# Altium PCB BGT60LTR11AIP_Shield_V2.0.PcbDoc
Units mm, origin at the board's own origin, x right, y up, seen from the top; angles counter-clockwise.
Board outline 20.32 x 6.25 mm, 4 copper layers (L1_Top, L2_GND, L3_SIG, L4_Bot), stack 1.144 mm thick; 64 components, 46 nets, 234 pads, 69 vias.
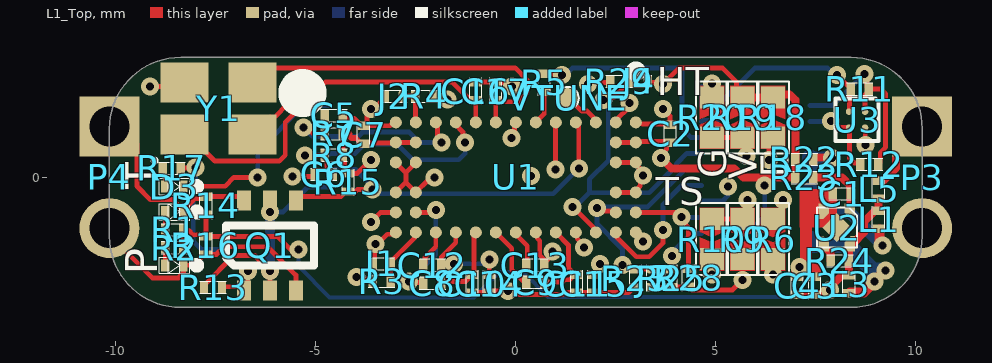
[diagram p0: L1_Top view]
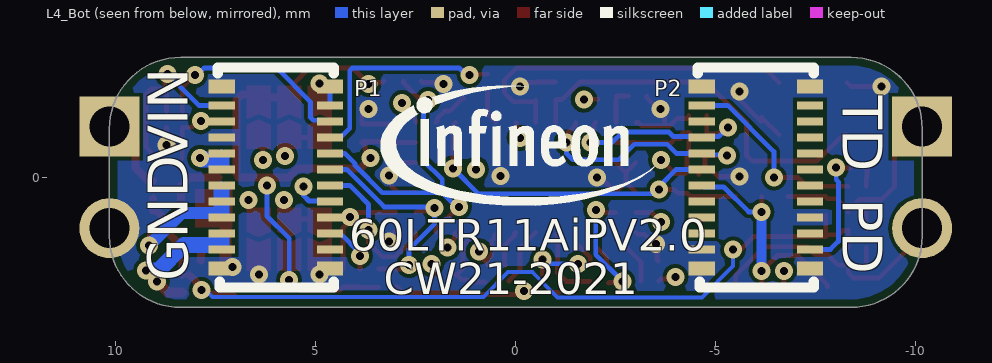
[diagram p1: L4_Bot view, seen from below]
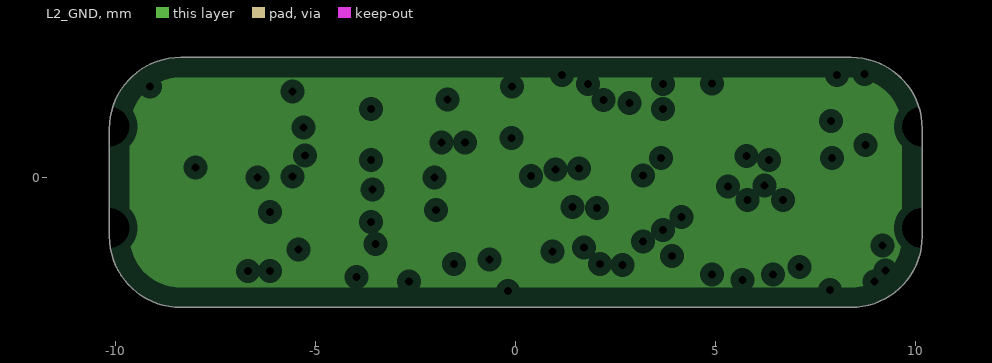
[diagram p2: L2_GND, clearances drawn from the general rule]
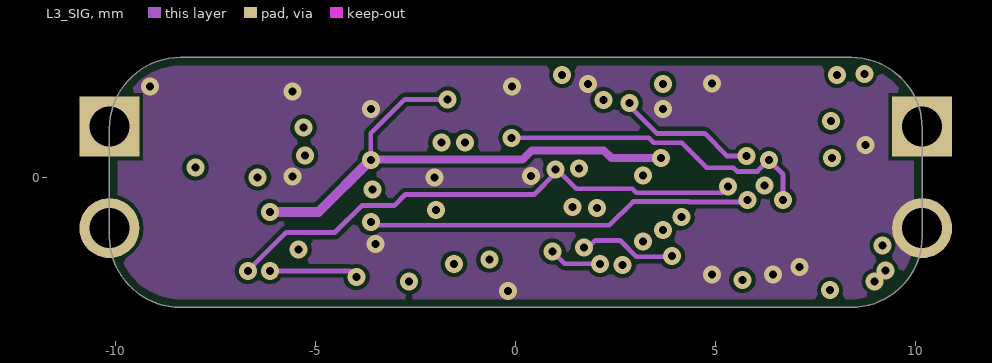
[diagram p3: L3_SIG]

## Layer stack, top to bottom
Top Solder: solder mask 0.02, Solder Resist, Dk 3.5
L1_Top: signal copper 0.042
Dielectric1: core 0.56, FR-4, Dk 4.2
L2_GND: plane copper 0.035
Dielectric8: prepreg 0.23, FR-4, Dk 4.2
L3_SIG: signal copper 0.035
Dielectric2: core 0.2, FR-4, Dk 4.3
L4_Bot: signal copper 0.042
Bottom Solder: solder mask 0.02, Solder Resist, Dk 3.5

## Board outline
-10.16,-1.472 ccw(c-8.382,-1.472) -8.382,-3.25 8.382,-3.25 ccw(c8.382,-1.472) 10.16,-1.472 10.16,1.222 ccw(c8.382,1.222) 8.382,3 -8.382,3 ccw(c-8.382,1.222) -10.16,1.222

## Design rules (kind name [scope] priority, off if disabled: settings)
BoardOutlineClearance [All] p1: gap=0.203 ignorepadtopadclearanceinfootprint=FALSE
Clearance Clearance_HighVoltage [InNetClass('HighVoltage') vs Not InNetClass('HighVoltage')] p1 off: gap=0.076 ignorepadtopadclearanceinfootprint=FALSE except(0: Arc-Hole Track-Hole SMDPad-Hole THPad-Hole Via-Hole Fill-Hole Poly-Hole Region-Hole Text-Hole)
Clearance Clearance_BGA [WithinRoom('BGA_Fanout_Area')] p2 off: gap=0.076 ignorepadtopadclearanceinfootprint=FALSE except(0: Arc-Hole Track-Hole SMDPad-Hole THPad-Hole Via-Hole Fill-Hole Poly-Hole Region-Hole Text-Hole) // Clearance for BGA Fanout Area
Clearance Clearance_NDK [((HoleType ='Round') and (PadisPlated = 'False')) and not (Holesize ='0')  or ((HoleType ='Slot') and (PadisPlated = 'False')) and not (Holesize ='0')] p3 off: gap=0.076 ignorepadtopadclearanceinfootprint=FALSE except(0: Arc-Hole Track-Hole SMDPad-Hole THPad-Hole Via-Hole Fill-Hole Poly-Hole Region-Hole Text-Hole) // Clearance Non Plated Holes
Clearance Clearance_Fiducials [InComponentClass('Fiducials')] p4 off: gap=1 ignorepadtopadclearanceinfootprint=FALSE except(0: Arc-Hole Track-Hole SMDPad-Hole THPad-Hole Via-Hole Fill-Hole Poly-Hole Region-Hole Text-Hole)
Clearance Clearance_Edge_Fiducials [InComponentClass('Fiducials')] p5 off: gap=6 ignorepadtopadclearanceinfootprint=FALSE except(0: Arc-Hole Track-Hole SMDPad-Hole THPad-Hole Via-Hole Fill-Hole Poly-Hole Region-Hole Text-Hole) // Protel DXP Scope 2 Expression Was: IsBoardOutline
Clearance Clearance_All [All] p6: gap=0.1 ignorepadtopadclearanceinfootprint=FALSE // minimum Clearance on PCB
ComponentClearance [HasFootprint('QS_Jumper') or HasFootprint('TP0.5MM')] p1: gap=0 collisioncheckmode=3 verticalgap=0 showdistances=FALSE
ComponentClearance ComponentClearance_All [All] p2: gap=0.12 collisioncheckmode=3 verticalgap=0 showdistances=FALSE
DiffPairsRouting DiffPairsRouting_Z0_DIFF_100R [InNetClass('Z0_DIFF_100R')] p1: maxlimit=0.2 minlimit=0.17 mostfreqgap=0.2 toplayer_mingap=0.2 toplayer_minwidth=0.381 toplayer_maxwidth=0.381 toplayer_prefwidth=0.381 midlayer1_maxgap=0.17 midlayer1_prefgap=0.17 midlayer1_minwidth=0.381 midlayer1_maxwidth=0.381 midlayer1_prefwidth=0.381 bottomlayer_mingap=0.2 bottomlayer_minwidth=0.381 bottomlayer_maxwidth=0.381 bottomlayer_prefwidth=0.381 maxuncoupledlength=25
DiffPairsRouting DiffPairsRouting_All [All] p2: maxlimit=0.5 minlimit=0.12 mostfreqgap=0.15 toplayer_minwidth=0.381 toplayer_maxwidth=0.381 toplayer_prefwidth=0.381 midlayer1_minwidth=0.381 midlayer1_maxwidth=0.381 midlayer1_prefwidth=0.381 bottomlayer_minwidth=0.381 bottomlayer_maxwidth=0.381 bottomlayer_prefwidth=0.381 maxuncoupledlength=25
FabricationTestPointUsage TestPointUsage [All] p1: valid=0 allowmultiple=FALSE
FabricationTestpoint Testpoint [All] p1: side=3 testpointundercomponent=TRUE minsize=1 maxsize=2.5 preferedsize=1.5 minholesize=0 maxholesize=1 preferedholesize=0.8 testpointgrid=0.025 allowsidetop=TRUE allowsidebottom=TRUE usegrid=TRUE gridtolerance=0
FanoutControl Fanout_LCC [All] p1 off: bgadir=Out bgaviamode=Centered fanoutstyle=Auto fanoutdirection=Alternating viagrid=0.025 // Protel DXP Scope 1 Expression Was: IsLCC   Fanout_LCC (Default Rule)
FanoutControl Fanout_BGA [All] p2 off: bgadir=Out bgaviamode=Centered fanoutstyle=Auto fanoutdirection=Alternating viagrid=0.025 // Protel DXP Scope 1 Expression Was: IsBGA   Fanout_BGA (Default Rule)
FanoutControl Fanout_SOIC [All] p3 off: bgadir=Out bgaviamode=Centered fanoutstyle=Auto fanoutdirection=Alternating viagrid=0.025 // Protel DXP Scope 1 Expression Was: IsSOIC   Fanout_SOIC (Default Rule)
FanoutControl Fanout_Default [All] p4: bgadir=Out bgaviamode=Centered fanoutstyle=Auto fanoutdirection=Alternating viagrid=0.025 // Fanout_Default (Default Rule)
FanoutControl Fanout_Small [All] p5 off: bgadir=Out bgaviamode=Centered fanoutstyle=Auto fanoutdirection=Alternating viagrid=0.025 // Protel DXP Scope 1 Expression Was: (CompPinCount < 5)   Fanout_Small (Default Rule)
Height Height_Top_In_Area [WithinRoom('Height_Top_Area')] p1: minheight=0 maxheight=8.4 prefheight=5.7 // Dedicated Height Constraint in Area
Height Height_Bot_No_Constraint [InComponentClass('Height_Bottom_exclude')] p2: minheight=0 maxheight=999 prefheight=12.7 // no max. Height constraint on Bottom Side
Height Height_Top_No_Constraint [InComponentClass('Height_Top_exclude')] p3: minheight=0 maxheight=999 prefheight=12.7 // no max. Height constraint on Top Side
Height Height_Bot [OnBottom] p4: minheight=0 maxheight=3 prefheight=2.5 // max. Component Height on PCB Bottom Side
Height Height_All [All] p5: minheight=0 maxheight=50 prefheight=12.7 // Default Component Height
HoleSize HoleSize_All [All] p1: absolutevalues=TRUE maxlimit=1 minlimit=0.1 maxpercent=80.000 minpercent=20.000
HoleToHoleClearance [All] p1: gap=0.25 allowstackedmicrovias=TRUE
Length Length_HighSpeed [InNetClass('HighSpeed')] p1: maxlimit=250 minlimit=0
Length Length_Default [InNetClass('TraceLength')] p2: maxlimit=500 minlimit=0 // min./max. Trace Length will be applied
MatchedLengths MatchedLengths_HighSpeed [InNetClass('HighSpeed')] p1: tolerance=25.4 checknetsindiffpair=FALSE checkdiffpairvsdiffpair=TRUE checkxsignals=TRUE checkothers=TRUE
MatchedLengths MatchedLengths_Default [InNetClass('MatchedLength')] p2: tolerance=100.5 checknetsindiffpair=TRUE checkdiffpairvsdiffpair=FALSE checkxsignals=FALSE checkothers=FALSE // Default Length Matching
MaxMinImpedance MaxMinImpedance_Z0_50R [InNetClass('Z0_50R')] p1: minimum=45,00 maximum=55,00 // Impedance Tolerance for 50 Ohms Traces
MaxMinImpedance MaxMinImpedance_All [All] p2: minimum=30,00 maximum=80,00 // Default Impedance Tolerance
MaximumViaCount MaximumViaCount_CLK [InNetClass('Clock')] p1: limit=10
MaximumViaCount MaximumViaCount_HighSpeed [InNetClass('HighSpeed')] p2: limit=10 // Max. Number of Vias in Net
MinimumAnnularRing MinimumAnnularRing_All [All] p1: minimumring=0.05
MinimumSolderMaskSliver [All] p1: minsoldermaskwidth=0.1
NetAntennae NetAntennae_High_Speed [InNetClass('HighSpeed')] p1: netantennaetolerance=3
NetAntennae NetAntennae_All [All] p2: netantennaetolerance=10
ParallelSegment ParallelSegment_Broad_Default [InNetClass('XTalk_Broadside_Coupled') vs InNetClass('HighSpeed') Or InNetClass('XTalk_Broadside_Coupled') Or InNetClass('XTalk_Edge_Coupled')] p1: limit=15 gap=0.2 // Default Rule for Broadside-Coupled Traces
ParallelSegment ParallelSegment_Edge_Default [InNetClass('XTalk_Edge_Coupled') vs InNetClass('HighSpeed') Or InNetClass('XTalk_Broadside_Coupled') Or InNetClass('XTalk_Edge_Coupled')] p2: limit=15 gap=0.12 // Default Rule for Edge-Coupled Traces
ParallelSegment ParallelSegment_Default [InNetClass('HighSpeed') vs InNetClass('HighSpeed')] p3: limit=25 gap=0.12 // Max. Coupled Length for all High-Speed Signals
PlaneClearance PlaneClearance_HighVoltage [InNetClass('HighVoltage')] p1: clearance=0.5
PlaneClearance [All] p2: clearance=0.2
PlaneConnect PlaneConnect_All [All] p1: planeconnectstyle=Direct reliefexpansion=0.2 reliefentries=4 reliefconductorwidth=0.25 reliefairgap=0.2
PolygonConnect PolygonConnect_HighCurrent [(OnTopLayer Or OnBottomLayer) And InNetClass('HighCurrent')] p1: connectstyle=Direct reliefconductorwidth=0.1 reliefentries=4 polygonreliefangle="45 Angle" airgapwidth=0.1
PolygonConnect PolygonConnect_Outer [OnTopLayer Or OnBottomLayer] p2: connectstyle=Direct reliefconductorwidth=0.1 reliefentries=4 polygonreliefangle="45 Angle" airgapwidth=0.1 // Polygon Connection on outer Layers
PolygonConnect PolygonConnect_All [All] p3: connectstyle=Direct reliefconductorwidth=0.1 reliefentries=4 polygonreliefangle="45 Angle" airgapwidth=0.1 // Default Polygon Connection
RoutingCorners [All] p1: cornerstyle=45-Degree minsetback=2 maxsetback=2
RoutingTopology RoutingTopology_CLK [InNetClass('Clock')] p1: topology=Daisy_Balanced
RoutingTopology RoutingTopology_HighSpeed [InNetClass('HighSpeed')] p2: topology=Daisy_Simple
RoutingTopology RoutingTopology_All [All] p3: topology=Shortest
RoutingVias RoutingVias_HighCurrent [InNetClass('HighCurrent')] p1: holewidth=0.1 width=0.2 viastyle="Through Hole" minholewidth=0.1 minwidth=0.2 maxholewidth=1 maxwidth=1 // Via Size for High-Current Nets
RoutingVias RoutingVias_BGA_Fanout [WithinRoom('BGA_Fanout_Area')] p2: holewidth=0.1 width=0.2 viastyle="Through Hole" minholewidth=0.1 minwidth=0.2 maxholewidth=1 maxwidth=1 // Via Size for BGA Fanout Area
RoutingVias RoutingVias_PWR [All] p3: holewidth=0.1 width=0.2 viastyle="Through Hole" minholewidth=0.1 minwidth=0.2 maxholewidth=1 maxwidth=1 // Via size for Power and GND nets
RoutingVias RoutingVias_All [All] p4: holewidth=0.1 width=0.2 viastyle="Through Hole" minholewidth=0.1 minwidth=0.2 maxholewidth=1 maxwidth=1 // Default Via size
SilkToSilkClearance [All] p1: silktosilkclearance=0.15
SilkToSolderMaskClearance SilkscreenOverComponentPads [IsPad] p1: minsilkscreentomaskgap=0.2 clearancetoexposedcopper=TRUE
SolderMaskExpansion [All] p1: expansion=0.051 istentingtop=FALSE
StubLength StubLength_CLK [InNetClass('Clock')] p1: limit=25
StubLength StubLength_HighSpeed [InNetClass('HighSpeed')] p2: limit=30
SupplyNets SupplyNets_GND [InNet('GND')] p1: voltage=0,000
SupplyNets SupplyNets_12V [InNetClass('PWR_Supply_12V')] p2: voltage=12,00
SupplyNets SupplyNets_5V0 [InNetClass('PWR_Supply_5V0')] p3: voltage=5,000
SupplyNets SupplyNets_3V3 [InNetClass('PWR_Supply_3V3')] p4: voltage=3,000
SupplyNets SupplyNets_1V0 [InNetClass('PWR_Supply_1V0')] p5: voltage=1,000
UnpouredPolygon [All] p1: allowunpoured=TRUE allowshelved=TRUE
Width Width_HighCurrent [All] p1 off: maxlimit=0.203 minlimit=0.076 preferedwidth=0.152 minimp=50.000000 maximp=50.000000 favimp=50.000000 // Width for High-Current Traces
Width Width_BGA_Fanout [WithinRoom('BGA_Fanout_Area')] p2 off: maxlimit=1 minlimit=0.1 preferedwidth=0.1 // Trace Width for BGA Fanout Area
Width Width_Z0_DIFF_100R [InNetClass('Z0_DIFF_100R')] p3 off: maxlimit=0.12 minlimit=0.11 preferedwidth=0.12 toplayer_minwidth=0.12 midlayer1_maxwidth=0.11 midlayer1_prefwidth=0.11 bottomlayer_minwidth=0.12 minimp=50.000000 maximp=50.000000 favimp=50.000000
Width Width_Z0_50R [InNetClass('Z0_50R')] p4 off: maxlimit=0.16 minlimit=0.12 preferedwidth=0.16 toplayer_minwidth=0.16 midlayer1_maxwidth=0.12 midlayer1_prefwidth=0.12 bottomlayer_minwidth=0.16 minimp=50.000000 maximp=50.000000 favimp=50.000000
Width Width_PWR [InNetClass('Power')] p5 off: maxlimit=5 minlimit=0.2 preferedwidth=0.2 // Width for Power and GND nets
Width Width_All [All] p6: maxlimit=5 minlimit=0.1 preferedwidth=0.12 // minimum Width on PCB
9 further rules are at their usual default settings.

## Components (designator, comment, footprint, x,y, rotation, side; value= is the part's Value field where it differs from the comment)
C1 "4.7µF" C_0201 8.153,-0.406 r0 top value=0201
C2 "100nF" C_0201 3.861,1.092 r270 top value=0201
C3 "4.7µF" C_0201 7.473,-2.711 r270 top value=0201
C4 "100nF" C_0201 7.033,-2.711 r270 top value=0201
C5 "150nF" C_0201 -4.547,1.548 r0 top
C6 "150nF" C_0201 -4.801,0.076 r0 top
C7 "100nF" C_0201 -3.81,1.067 r270 top value=0201
C8 "10nF" C_0201 -2.088,-2.641 r180 top
C9 "10nF" C_0201 0.486,-2.616 r180 top
C10 "5.6nF" C_0201 -1.087,-2.655 r90 top
C11 "5.6nF" C_0201 1.524,-2.655 r90 top
C12 "10nF" C_0201 -2.088,-2.191 r180 top
C13 "10nF" C_0201 0.486,-2.191 r180 top
C14 "5.6nF" C_0201 -0.662,-2.655 r90 top
C15 "5.6nF" C_0201 1.949,-2.655 r90 top
C16 "11pF" C_0201 -1,2.159 r90 top value=0201
C17 "16pF" C_0201 -0.5,2.159 r270 top value=0201
D3 "Yellow LED 0201" LED_0201 -8.534,-0.229 r180 top value=0201
J1 "DNP" QS_JUMPER -3.353,-2.159 r0 top value=0201
J2 "0R" QS_JUMPER -3.048,2.032 r0 top value=0201
J3 "100K" QS_JUMPER 3.429,-2.518 r90 top value=0201
J4 "100K" QS_JUMPER 3.073,2.407 r180 top value=0201
L1 "DNP" R_0201 9.068,-1.057 r90 top
L3 "MMZ0603S121HT000" R_0201 8.331,-2.667 r90 top
L5 "MMZ0603S121HT000" R_0201 9.068,-0.305 r270 top
P "Red LED 0201" LED_0201 -8.534,-2.197 r180 top value=XZMER155W
P1 "DF40C-20DP-0.4V" DF40C-20DP-0.4V 6,0 r270 bottom locked
P2 "DF40C-20DP-0.4V" DF40C-20DP-0.4V -6,0 r270 bottom locked
P3 "2 Pin Header" HDR1X2_HALF 10.16,1.27 r270 top locked
P4 "2 Pin Header" HDR1X2_HALF -10.16,1.27 r270 top locked
Q1 "BSD840N" INF-PG-SOT-363_N -6.147,-1.702 r90 top
R1 "1k" R_0201 -8.534,-1.308 r0 top value=0201
R2 "1K" R_0201 -8.534,-1.753 r0 top value=0201
R3 "0R" R_0201 -3.353,-2.591 r180 top value=0201
R4 "DNP" R_0201 -2.286,2.032 r0 top value=0201
R5 "0R" R_0201 0.711,2.367 r90 top value=0201
R6 "0R" RES_FASTSOLDER_0402 6.426,-1.541 r90 top value=0402
R7 "DNP" R_0201 -4.547,1.091 r0 top value=0201
R8 "DNP" R_0201 -4.547,0.559 r180 top value=0201
R9 "DNP" RES_FASTSOLDER_0402 5.664,-1.541 r90 top value=0402
R10 "0R" RES_FASTSOLDER_0402 4.902,-1.541 r90 top value=0402
R11 "2k2" R_0201 8.597,2.21 r180 top value=0201
R12 "2k2" R_0201 8.839,0.33 r180 top value=0201
R13 "100k" R_0201 -7.569,-2.743 r180 top value=0201
R14 "10k" R_0201 -7.747,-0.711 r270 top value=0201
R15 "100k" R_0201 -4.191,-0.127 r90 top value=0201
R16 "10k" R_0201 -7.747,-1.702 r90 top value=0201
R17 "1k" R_0201 -8.6,0.229 r0 top value=0201
R18 "DNP" RES_FASTSOLDER_0402 6.426,1.499 r270 top value=0402
R19 "DNP" RES_FASTSOLDER_0402 5.664,1.499 r270 top value=0402
R20 "DNP" RES_FASTSOLDER_0402 4.902,1.499 r270 top value=0402
R22 "DNP" R_0201 7.214,0.457 r0 top value=0201
R23 "0R" R_0201 7.214,0 r0 top value=0201
R24 "0R" R_0201 8.103,-2.083 r0 top value=0201
R25 "10K" R_0201 3.886,-2.519 r90 top value=0201
R27 "DNP" R_0201 3.001,-2.518 r90 top value=0201
R28 "10K" R_0201 4.318,-2.511 r90 top value=0201
R29 "DNP" R_0201 2.583,2.407 r0 top value=0201
T "Green LED" LED_0201 -8.534,-0.864 r180 top value=XZBGR155W5MAV
U1 "BGT60LTR11AiP" BGA42N50P13X7_670X330X56_NEW 0,0 r270 top locked
U2 "NCP163AMX150TBG" NCP177 8.026,-1.254 r180 top
U3 "24CW1280T-I/CS0668" "WLCSP4 (CS0)" 8.531,1.445 r270 top
VTUNE "Testpoint" TP0.3MM 1.295,1.981 r90 top
Y1 "FH3840024Z" "NDK NX2520SA_NOBOARDER" -7.43,1.717 r0 top

## Footprints (in the part's own frame and the unit in brackets; to place one, negate y for a bottom-side part, rotate by r counter-clockwise, add the part's x,y. Pads: shape width x height; smd on the part's side, far side on the other; paste and mask are expansions set on the pad)
BGA42N50P13X7_670X330X56_NEW [mm] "BGA, SMD, 0.50 mm pitch, 42 pin, 3.30 mm X 6.70 mm X 0.56 mm H Body"
  round 0.3 smd paste+0 mask+0: A1(-1.375,3) A2(-0.875,3) A3(-0.375,3) A4(0.375,3) A5(0.875,3) A6(1.375,3) B1(-1.375,2.5) B2(-0.875,2.5) B3(-0.375,2.5) B4(0.375,2.5) B5(0.875,2.5) B6(1.375,2.5) C1(-1.375,2) C6(1.375,2) D1(-1.375,1.5) D6(1.375,1.5) E1(-1.375,1) E6(1.375,1) F1(-1.375,0.5) F6(1.375,0.5) G1(-1.375,0) G6(1.375,0) H1(-1.375,-0.5) H6(1.375,-0.5) J1(-1.375,-1) J6(1.375,-1) K1(-1.375,-1.5) K6(1.375,-1.5) L1(-1.375,-2) L6(1.375,-2) M1(-1.375,-2.5) M2(-0.875,-2.5) M3(-0.375,-2.5) M4(0.375,-2.5) M5(0.875,-2.5) M6(1.375,-2.5) N1(-1.375,-3) N2(-0.875,-3) N3(-0.375,-3) N4(0.375,-3) N5(0.875,-3) N6(1.375,-3)
  silkscreen extent -2.78,2.88 -2.53,3.13, body extent -1.65,-3.35 1.65,3.35, height 0.56
C_0201 [mm] "C_0201"
  rect 0.21x0.3 smd mask+0.051: 1(-0.225,0) 2(0.225,0)
  silkscreen extent -0.33,-0.15 0.33,0.15, body extent -0.3,-0.15 0.3,0.15, height 0.3
DF40C-20DP-0.4V [mm] "Hirose DF40C-20DP-0.4V"
  rect 0.2x0.66 smd: 1(-1.8,-1.355) 2(-1.8,1.355) 3(-1.4,-1.355) 4(-1.4,1.355) 5(-1,-1.355) 6(-1,1.355) 7(-0.6,-1.355) 8(-0.6,1.355) 9(-0.2,-1.355) 10(-0.2,1.355) 11(0.2,-1.355) 12(0.2,1.355) 13(0.6,-1.355) 14(0.6,1.355) 15(1,-1.355) 16(1,1.355) 17(1.4,-1.355) 18(1.4,1.355) 19(1.8,-1.355) 20(1.8,1.355)
  rect 0.35x0.66 smd: 21(-2.275,-1.355) 22(-2.275,1.355) 23(2.275,-1.355) 24(2.275,1.355)
  silkscreen extent -2.75,-1.45 2.75,1.45, body extent -2.76,-1.5 2.76,1.47, height 1.09
HDR1X2_HALF [mm] "Connector; Header; 2 Position"
  rect 1.5x1.5 hole 1: 1(0,0)
  round 1.5 hole 1: 2(2.54,0)
INF-PG-SOT-363_N [mm] "SOT23, 3-Leads, Body 2x1.25mm, Pitch 0.65mm, IPC Medium Density"
  rect 0.5x0.35 smd: 1(-1.125,0.65) 2(-1.125,0) 3(-1.125,-0.65) 4(1.125,-0.65) 5(1.125,0) 6(1.125,0.65)
  silkscreen extent -0.5,-1.1 0.5,1.1, body extent -1.15,-1.05 1.15,1.05, height 1
LED_0201 [mm] "LED_0201"
  rect 0.21x0.3 smd mask+0.051: 1(-0.225,0) 2(0.225,0)
  silkscreen extent -0.62,-0.2 0.38,0.2, body extent -0.3,-0.15 0.3,0.15, height 0.13
NCP177 [mm] "LDO 500mA"
  rect 0.11x0.39 smd: 1(-0.4,-0.405) 2(0.4,-0.405) 3(0.4,0.405) 4(-0.4,0.405)
  rect 0.1x0.1 smd: 1(-0.34,-0.37) 2(0.34,-0.37) 3(0.34,0.37) 4(-0.34,0.37)
  rect 0.26x0.24 smd: 1(-0.325,-0.48) 2(0.325,-0.48) 3(0.325,0.48) 4(-0.325,0.48)
  rect 0.1x0.212 smd rot 45: 1(-0.305,-0.321) 3(0.305,0.321)
  rect 0.212x0.1 smd rot 45: 2(0.305,-0.321) 4(-0.305,0.321)
  rect 0.52x0.52 smd rot 45: 5(0,0)
  silkscreen extent -0.5,-0.5 0.5,0.5, body extent -0.5,-0.5 0.5,0.5, height 0.4
"NDK NX2520SA_NOBOARDER" [mm] "Crystal, 4-Leads, Body 2.00x2.50mm, Pitch 1.70mm, IPC Medium Density"
  rect 1.2x1 smd: 1(-0.85,-0.65) 2(0.85,-0.65) 3(0.85,0.65) 4(-0.85,0.65)
  silkscreen extent -1.65,-1.35 -1.55,-1.25, body extent -1.26,-1.01 1.26,1.01, height 0.5
QS_JUMPER [mm] "R_0201"
  rect 0.21x0.3 smd mask+0.051: 1(-0.225,0)
  rrect50% 0.21x0.3 smd mask+0.051: 2(0.225,0)
  silkscreen extent -0.33,-0.15 0.33,0.15, body extent -0.3,-0.15 0.3,0.15, height 0.13
R_0201 [mm] "R_0201"
  rect 0.21x0.3 smd mask+0.051: 1(-0.225,0) 2(0.225,0)
  silkscreen extent -0.33,-0.15 0.33,0.15, body extent -0.3,-0.15 0.3,0.15, height 0.13
RES_FASTSOLDER_0402 [mm] "Chip Resistor, 2-Leads, Body 1,05x0,54mm, IPC High Density"
  rect 0.55x0.6 smd mask+0.051: 1(-0.5,0) 2(0.5,0)
  L1_Top region: 0.051,0.305 -0.076,0 0.051,-0.305 -0.787,-0.305 -0.787,0.305
  L1_Top region: 0.051,0 0.178,0.305 0.787,0.305 0.787,-0.305 0.178,-0.305
  L1_Top region: 0.051,0.305 -0.076,0 0.051,-0.305 -0.787,-0.305 -0.787,0.305
  L1_Top region: 0.051,0 0.178,0.305 0.787,0.305 0.787,-0.305 0.178,-0.305
  silkscreen extent -0.9,-0.4 0.9,0.4, body extent -0.55,-0.3 0.55,0.3, height 0.4
TP0.3MM [mm]
  round 0.5 smd: 1(0,0)
  silkscreen extent -0.28,-0.28 0.28,0.28
"WLCSP4 (CS0)" [mm] "WLCSP Package, 0.4mm Pin Pitch"
  round 0.163 smd mask+0.05: A1(-0.2,0.2) A2(0.2,0.2) B1(-0.2,-0.2) B2(0.2,-0.2)
  silkscreen extent -0.53,-0.53 0.53,0.53, body extent -0.4,-0.4 0.4,0.4, height 0.23

## Part data
C1 C2 C3 C4 C7 C16 C17: library part Cap, "Capacitor", LatestRevisionDate=17-Jul-2002, LatestRevisionNote="Re-released for DXP Platform.", PackageDescription="Radial Cap, Thru-Hole; 2 Leads; 0.3 in Pin Spacing", PackageReference=RAD-0.3, Published=8-Jun-2000, Publisher="Altium Limited"
C5 C6 C8 C9 C10 C11 C12 C13 C14 C15: library part Cap
D3: library part 392056, "XZMYR155W", Legacy PartNumber=DIO00500016, Manufacturer="Rohm Semiconductors", Manufacturer Component Status=Active, Temperature max=85, Temperature min=-40, Temperature Range=Industrial, Application=Standard, Article Number=392056, Automotive Qualified=No, Combined Parameters=Vf:2.9V;If:20mA;Ur:5V;Ir:100ÂµA;Pmax:66mW, ComponentLink1Description="Vendor WebSite", ComponentLink1URL=http://www.rohm.com, ComponentLink2Description=Datasheet, ComponentLink2URL=http://webnetprod.muc.infineon.com/pcbportal_prod/WorkFlows/AltiumComponent/StandardDocumentation?Versionid=392057, ComponentStatus=Released, Legacy DeviceID=DIO00500016, Manufacturer Order Number=XZMYR155W, PackageReference=0201, Part Type=Diode, ROHS Compliant=Y, Second Source allowed=Yes, Style=Single, Supplier 1=Farnell, Supplier 2=DigiKey, Supplier 3=Mouser, Supplier Part Number 2=1497-1299-1-ND, Symbol Type="Standard LED Symbol, 1 Cathode, 2 Anode", Type=LED, Version Number=V01
J1 J2 J3 J4: library part QS_Jumper, "3 pads for QS pins configuration (soldering needed)"
L1 L5: library part INDUCTOR1, "SMD Ferrite Bead", FootprintBOM=0805, Hersteller=Würth, Kleinmengendistributor=Digi-Key, KleinmengendistributorBestellnummer=732-1601-1-ND, Preis=0
L3: library part INDUCTOR1, FootprintBOM=0805, Hersteller=Würth, Kleinmengendistributor=Digi-Key, KleinmengendistributorBestellnummer=732-1601-1-ND, Preis=0
P: library part 392056, "XZMER155W", Manufacturer="Rohm Semiconductors", Manufacturer Component Status=Active, Temperature max=85, Temperature min=-40, Temperature Range=Industrial, Application=Standard, Automotive Qualified=No, Combined Parameters=Vf:2.9V;If:20mA;Ur:5V;Ir:100ÂµA;Pmax:66mW, ComponentLink1Description="Vendor WebSite", ComponentLink1URL=http://www.rohm.com, ComponentLink2Description=Datasheet, ComponentLink2URL=http://webnetprod.muc.infineon.com/pcbportal_prod/WorkFlows/AltiumComponent/StandardDocumentation?Versionid=392057, ComponentStatus=Released, Manufacturer Order Number=XZMER155W, Part Type=Diode, ROHS Compliant=Y, Second Source allowed=Yes, Style=Single, Supplier 1=Farnell, Supplier 2=DigiKey, Supplier 3=Mouser, Supplier Part Number 2=1497-1297-1-ND, Symbol Type="Standard LED Symbol, 1 Cathode, 2 Anode", Type=LED, Version Number=V01
P1 P2: "Hirose DF40C-20DS-0.4V - 61GHz side", System=Connector
P3 P4: library part "Header 2", "Header, 2-Pin", LatestRevisionDate=17-Jul-2002, LatestRevisionNote="Re-released for DXP Platform.", Publisher="Altium Limited"
Q1: "N-Channel OptiMOS 2 Small-Signal-Transistor, 20 V VDS, 0.88 A ID, -55 to 150 degC, PG-SOT-363, Reel, Green", Manufacturer=Infineon, ComponentLink1Description="Manufacturer URL", ComponentLink1URL=http://www.infineon.com/, ComponentLink2Description=Datasheet, ComponentLink2URL=http://www.infineon.com/dgdl/BSD840N_Rev2.3_.pdf?folderId=db3a3043156fd573011622e10b5c1f67&fileId=db3a30431b0626df011b12b4486c7c02, ComponentLink3Description="Package Specification", ComponentLink3URL=http://www.infineon.com/dgdl/SOT363-Package_Overview.pdf?folderId=db3a30431936bc4b01195360bd8f3cdc&fileId=db3a30431936bc4b0119536b62bf3cf5, DatasheetVersion="Rev. 2.3", Green=TRUE, Halogen-free=TRUE, ID (max)="0.88 A", IDpuls (max)="3.5 A", Mounting Technology="Surface Mount", PackageDescription="6-Pin Small Outline Transistor Package, 2 x 1.25 mm Body, 0.65 mm Pitch", PackageReference=PG-SOT-363, PackageVersion=Apr-08, Packing=Reel, Partnumber=BSD840N, Ptot (max)="0.5 W", QG="0.26 nC", RDS (on) (max)="400 mOhm", RDS (on) (max) (@1.8V)="560 mOhm", RDS (on) (max) (@2.5V)="400 mOhm", RthJA (max)="250 K/W", VDS (max)="20 V", VGS(th) (max)="0.75 V", VGS(th) (min)="0.3 V"
R1 R2 R3 R4 R5 R7 R8 R11 R12 R13 R14 R15 R16 R17 R22 R23 R24 R25 R27 R28 R29: library part Res2, "Resistor"
R6 R9 R10 R18 R19 R20: library part RES_FS, "Resistor"
T: library part 392056, "XZBGR155W5MAV", Manufacturer="Rohm Semiconductors", Manufacturer Component Status=Active, Temperature max=85, Temperature min=-40, Temperature Range=Industrial, Application=Standard, Article Number=392056, Automotive Qualified=No, Combined Parameters=Vf:2.9V;If:20mA;Ur:5V;Ir:100ÂµA;Pmax:66mW, ComponentLink1Description="Vendor WebSite", ComponentLink1URL=http://www.rohm.com, ComponentLink2Description=Datasheet, ComponentLink2URL=http://webnetprod.muc.infineon.com/pcbportal_prod/WorkFlows/AltiumComponent/StandardDocumentation?Versionid=392057, ComponentStatus=Released, Manufacturer Order Number=XZBGR155W5MAV, PackageReference=0201, Part Type=Diode, ROHS Compliant=Y, Second Source allowed=Yes, Style=Single, Supplier 1=Farnell, Supplier 2=DigiKey, Supplier 3=Mouser, Supplier Part Number 2=1497-1295-1-ND, Symbol Type="Standard LED Symbol, 1 Cathode, 2 Anode", Type=LED, Version Number=V01
U1: library part 595740, "BGT60LTR11AiP, BGA 42 pins", Manufacturer="Infineon Technologies", Package Description="BGA, SMD, 0.50 mm pitch, 42 pin, 3.30 mm X 6.70 mm X 0.552 mm H Body", Temperature Range=Military, Voltage DC (max)=na, Alternate View=No, Article Number=595740, Combined Parameters="- -;Vdc min/max:-;Iout:-;Fmax:-", ComponentLink1Description="Vendor WebSite", ComponentLink1URL=https://www.infineon.com/, ComponentLink2Description=Datasheet, ComponentLink2URL=http://webnetprod.muc.infineon.com/PCBPortal_Prod/WorkFlows/AltiumComponent/StandardDocumentation?Versionid=595741, Legacy DeviceID=IFX_BGT60LTR11AiP, Manufacturer Order Number=BGT60LTR11AiP, Muliple Parts=No, Part Type="Integrated Circuit", PLMStatus="Not Recommended For New Designs", Second Source allowed=Yes, Supplier 1=Farnell, Supplier 2=DigiKey, Supplier 3=Mouser, Symbol Type="Low Power 60GHz Doppler Radar Sensor with Antenna", Version Number=V01
U2: library part NCP177, "NCP163 - LDO 250mA, XDFN4, / ultra-low noise, high PSRR"
U3: library part 24CW128X, "128K I2C Serial EEPROM with Software Write Protection in CSP4 Package, 0.4mm Pin Pitch"
VTUNE: library part P_PRUEFPAD, FootprintBOM=Testpoint, Preis=-
Y1: library part 409657, Manufacturer="Nihon Dempa Kogyo", Manufacturer Component Status=Active, Temperature max=85, Temperature min=-30, Application=Standard, Automotive Qualified="AEC Q200", Combined Parameters="Standard Standard Crystal", ComponentLink1Description="Vendor WebSite", ComponentLink1URL=http://www.ndk.com/en/, ComponentLink2Description=Datasheet, ComponentLink2URL=http://webnetprod.muc.infineon.com/pcbportal_prod/WorkFlows/AltiumComponent/StandardDocumentation?Versionid=409658, ComponentStatus=Released, Manufacturer Order Number=FH3840024Z, PackageReference="SMD 2.5 x 2 x 0.6mm", Part Type=Clock, ROHS Compliant=Y, Second Source allowed=Yes, Style=Standard, Supplier 1=Farnell, Supplier 2=DigiKey, Supplier 3=Mouser, Supplier Part Number 2=FH3840024ZCT-ND, Symbol Type="Standard Crystal Symbol, 4 Pins", Type=Crystal, Version Number=V01

## Via types
v1: diameter 0.45, hole 0.2, L1_Top to L4_Bot, tented both sides, 69 vias

## Nets (pads, with @x,y where several pads share a name; then routed paths per layer and width w, separated by ;. In a path a pad name is that pad's centre, name@x,y a point inside that pad or via, vN(x,y) a via of type N, cw(c..) or ccw(c..) an arc to the next point about the centre after c; other vN are vias at no path point)
1V5_LDO: C1.2 R23.2 U2.1 | length 1.6
  L1_Top w0.2: R23.2@7.444,-0.005 R23.2 8.153,0 8.373,-0.22 8.373,-0.406 8.373,-0.754 8.353,-0.774 U2.1@8.351,-0.774
1V5Sensor: P1.7 P1.9 R22.2 | length 1.2
  L1_Top w0.2: R22.2@7.498,0.499 7.835,0.499 7.875,0.459 v1(7.899,0.483)
  L4_Bot w0.4: 7.355,0.305 7.355,0.442 ; 7.355,0.495 7.355,0.442 ; v1(7.899,0.483) 7.859,0.442 7.355,0.442
1V8Sensor: L1.1 P1.11 P1.13 P1.15 | length 3.2
  L1_Top w0.25: L1.1@9.093,-1.302 9.093,-1.571 9.169,-1.648 v1(9.169,-1.702)
  L4_Bot w0.25: v1@9.169,-1.702 v1@9.175,-1.708
  L4_Bot w0.3: 7.355,-0.889 8.357,-0.889 v1(9.169,-1.702)
  L4_Bot w0.4: 7.355,-0.889 P1.13 7.355,-0.305
3V3: L5.1 P3.1 | length 1.7
  L1_Top w0.2: L5.1 9.073,-0.075 9.197,-0.075 9.51,0.238 9.51,0.923 P3.1@9.857,1.27
3V3digital: P2.20 R17.2 | length 3
  L1_Top w0.12: R17.2 -8.368,0.235 -8.017,0.235 v1(-8.01,0.242)
  L4_Bot w0.12: v1(-8.01,0.242) -8.01,-0.053 -8.065,-0.108 -8.065,-1.6 -7.865,-1.8 P2.20
3V3digital1: P1.1 R11.1 R12.1 U3.A1 | length 5
  L1_Top w0.12: v1(8.712,2.591) 8.712,2.515 8.777,2.451 8.777,2.255 R11.1 ; U3.A1 8.731,2.074 8.822,2.165 R11.1 ; R12.1 9.109,0.375 9.109,0.618 9.245,0.753 9.245,2.094 9.129,2.21 R11.1
  L4_Bot w0.12: P1.1 7.921,1.8 v1(8.712,2.591)
3V3Sensor: L3.1 P1.17 P1.19 | length 3.6
  L1_Top w0.25: L3.1@8.351,-2.872 8.701,-2.872 v1(8.973,-2.6) v1(9.245,-2.328)
  L4_Bot w0.4: 7.355,-1.524 7.355,-1.689 8.295,-1.689 8.973,-2.367 v1(8.973,-2.6) ; 9.011,-2.328 v1(9.245,-2.328)
BGT_DIV: R5.1 U1.F1 | length 0.9
  L1_Top w0.12: U1.F1 0.711,1.586 R5.1
BGT_MISO_1.5_A: P1.12 U1.B6 | length 3.8
  L1_Top w0.12: U1.B6 2.5,-1.47 3.016,-1.985 3.334,-1.985 3.683,-1.637 v1(3.683,-1.321)
  L4_Bot w0.12: v1(3.683,-1.321) 3.683,-0.67 4.005,-0.348 4.153,-0.2 P1.12
BGT_MOSI_1.5_A: J3.2 P1.10 R27.2 U1.B5 | length 6
  L1_Top w0.12: v1(2.032,-0.77) 2.121,-0.77 2.192,-0.841 2.466,-0.841 U1.B5 ; v1(2.667,-2.184) 2.756,-2.184 2.865,-2.293 R27.2 J3.2
  L4_Bot w0.12: v1(2.667,-2.184) 2.667,-1.797 2.032,-1.162 2.032,-0.737 3.294,-0.737 4.231,0.2 P1.10
BGT_PHASE_DET: P2.9 Q1.4 R15.1 U1.D1 | length 9.9
  L1_Top w0.12: Q1.4@-5.497,-0.475 -4.365,-0.475 -4.285,-0.395 -4.058,-0.395 -4.013,-0.35 -4.006,-0.35 -3.961,-0.305 -3.961,-0.299 v1(-3.581,-0.299) ; U1.D1 1.575,1.3 v1(1.575,0.229)
  L4_Bot w0.12: P2.9 -4.644,0.199 -4.007,0.199 -3.581,-0.228 v1(-3.581,-0.299) -3.473,-0.406 0.935,-0.406 1.57,0.229 v1(1.575,0.229)
BGT_PLL_TRIG_1.5: R6.2 R18.2 U1.G1 | length 9.1
  L1_Top w0.12: v1(-0.102,0.991) -0.102,1.08 -0.034,1.147 -0.034,1.341 U1.G1 ; v1(6.325,0.432) 6.325,0.897 R18.2
  L3_SIG w0.12: v1(-0.102,0.991) 3.321,0.991 3.444,0.868 4.144,0.868 4.77,0.242 5.439,0.242 5.533,0.148 6.041,0.148 v1(6.325,0.432) 6.68,0.076 v1(6.68,-0.559)
BGT_RTSN_1.5_A: P1.16 R28.2 U1.A5 | length 3.1
  L1_Top w0.12: U1.A5 4.025,-0.875 v1(4.14,-0.991) 4.14,-1.08 4.318,-1.258 R28.2
  L4_Bot w0.12: v1(4.14,-0.991) 4.153,-1.003 4.642,-1.003 P1.16
BGT_SCK_1.5_A: J4.2 P1.8 R29.2 U1.C6 | length 8.1
  L1_Top w0.12: v1(1.415,-0.737) 1.424,-0.737 2,-1.313 U1.C6 ; v1(2.192,1.933) 2.255,1.996 2.442,1.996 2.808,2.362 R29.2
  L4_Bot w0.12: v1(1.415,-0.737) 1.488,-0.737 1.839,-0.385 ; v1(2.192,1.933) 2.311,1.813 2.311,0.421 1.839,-0.052 1.839,-0.385 ; P1.8 4.279,0.6 4.017,0.338 4.017,0.298 3.334,-0.385 1.839,-0.385
BGT_SELECT_1.5_A: P1.18 R25.2 U1.D6 | length 4.2
  L1_Top w0.12: U1.D6 1.534,-1.409 1.534,-1.536 v1@1.684,-1.685 ; R25.2 3.893,-2.287 3.893,-1.971 v1(3.899,-1.965)
  L3_SIG w0.12: v1@1.766,-1.797 1.988,-1.575 2.605,-1.575 3.016,-1.985 v1@3.879,-1.985
  L4_Bot w0.12: v1(1.702,-1.753) 1.708,-1.753 1.727,-1.771 1.753,-1.797 v1@1.766,-1.797 ; v1@3.879,-1.985 v1(3.899,-1.965) 3.899,-1.889 4.389,-1.4 P1.18
BGT_TARGET_DET: P1.14 Q1.1 R13.1 U1.E1 | length 16.5
  L1_Top w0.12: R13.1 -7.335,-2.734 -6.806,-2.734 -6.797,-2.725 -6.7,-2.628 v1(-6.7,-2.337) ; v1(0.991,0.203) 0.991,1.366 U1.E1
  L3_SIG w0.12: v1(-6.7,-2.337) -5.74,-1.377 -4.52,-1.377 -3.848,-0.705 -3.041,-0.705 -2.764,-0.427 0.463,-0.427 0.991,0.101 v1(0.991,0.203) 1.025,0.203 1.512,-0.283 2.914,-0.283 3.016,-0.385 5.152,-0.385 v1(5.309,-0.229)
  L4_Bot w0.12: P1.14 4.656,-0.589 5.171,-0.589 5.309,-0.451 v1(5.309,-0.229)
BGT_VTUNE: U1.C1 VTUNE.1 | length 1
  L1_Top w0.12: VTUNE.1 1.332,1.981 1.654,1.659 1.781,1.659 1.966,1.474 1.966,1.409 U1.C1
GND: C1.1 C2.1 C3.1 C4.1 C5.2 C6.1 C7.1 C10.1 C11.1 C14.1 C15.1 C16.2 C17.1 J1.1 J2.1 P1.2 P1.5 P1.21 P1.22 P1.23 P1.24 P2.16 P2.19 P2.21 P2.22 P2.23 P2.24 P3.2 R6.1 R10.1 R20.1 R27.1 R29.1 U1.A1 U1.A3 U1.A4 U1.A6 U1.B3 U1.B4 U1.M3 U1.M4 U1.N1 U1.N3 U1.N4 U1.N6 U2.2 U2.5 U3.A2 Y1.2 Y1.4 | length 20.5
  L1_Top w0.12: v1(-9.144,2.275) -8.372,2.275 Y1.4 ; Y1.2 -6.14,1.507 -6.14,1.397 -5.588,1.949 v1(-5.588,2.151) ; v1(-5.588,0.025) -5.049,0.025 C6.1@-4.975,0.1 ; C5.2 -4.322,1.518 -4.277,1.473 -4.037,1.473 -3.855,1.292 C7.1 C7.1@-3.765,1.292 ; J1.1@-3.553,-2.086 -3.528,-2.061 -3.528,-1.689 v1(-3.502,-1.664) ; -3.321,-1.53 -3.209,-1.419 -3.044,-1.419 U1.N6 ; J2.1 -3.273,1.987 -3.55,1.71 v1(-3.614,1.71) -3.614,1.634 -3.72,1.528 -3.72,1.337 C7.1@-3.765,1.292 ; U1.N4 -2.75,-0.125 ; U1.N3 -3,0.371 -2.751,0.122 -2.751,-0.124 -2.75,-0.125 ; U1.N1 -3.062,1.375 -3.145,1.292 C7.1@-3.765,1.292 ; U1.M3 -2.5,0.371 -2.749,0.122 -2.749,-0.124 -2.75,-0.125 ; v1(-2.035,-0.001) -2.098,-0.064 -2.19,-0.064 U1.M4 -2.75,-0.125 ; C10.1 C14.1 -0.619,-2.837 -0.173,-2.837 -0.083,-2.926 1.173,-2.926 1.219,-2.88 C11.1 C15.1 2.819,-2.88 2.956,-2.743 R27.1 ; C16.2 C17.1 -0.489,2.373 -0.199,2.373 v1(-0.101,2.275) ; v1(1.803,2.337) 1.838,2.372 2.323,2.372 R29.1 ; U1.B4@2.5,-0.373 U1.B4 U1.A4@3.062,-0.375 ; U1.B3 2.5,0.371 3,0.371 U1.A3 3,0.326 3.112,0.214 3.112,-0.214 3,-0.326 U1.A4 ; U1.A6 3.051,-1.375 3.175,-1.499 v1(3.175,-1.6) ; U1.A1 3.034,1.341 3.153,1.341 3.16,1.333 3.841,1.333 3.851,1.343 3.851,1.542 v1(3.683,1.71) ; U3.A2 8.734,1.241 8.734,0.816 v1(8.738,0.813)
  L1_Top w0.3: v1@7.253,-2.22 7.253,-1.222 ; 7.533,-0.942 7.626,-0.849 U2.2@7.701,-0.774
  L4_Bot w0.12: P1.2 P1.22
  other v1: -0.199,-2.837 4.902,-2.43 6.426,-2.43 7.087,-2.235 0.38,0.035 3.175,0.051 4.902,2.352
I2C_SCL: P1.4 R11.2 U3.B1 | length 5.3
  L1_Top w0.12: v1(8.026,2.565) 8.313,2.279 8.327,2.279 8.372,2.234 R11.2 8.339,2.178 8.339,1.653 U3.B1
  L4_Bot w0.12: P1.4 4.672,1.427 5.063,1.427 5.135,1.499 5.135,1.89 5.982,2.737 7.791,2.737 7.963,2.565 v1(8.026,2.565)
I2C_SDA: P1.3 R12.2 U3.B2 | length 2.2
  L1_Top w0.12: v1@7.88,1.41 v1(7.874,1.404) 7.95,1.404 8.101,1.253 8.323,1.253 U3.B2 8.339,1.236 8.339,0.484 8.461,0.362 8.582,0.362 R12.2
  L4_Bot w0.12: P1.3 v1@7.874,1.4
IF1i_N: C13.1 C15.2 U1.F6 | length 2.9
  L1_Top w0.12: U1.F6@0.502,-1.426 0.534,-1.458 0.534,-1.523 0.6,-1.588 0.6,-1.95 C13.1@0.708,-2.057 ; C13.1 C13.1@0.711,-2.146 ; C13.1@0.711,-2.061 C13.1@0.711,-2.146 ; v1(0.914,-1.854) 0.914,-1.943 C13.1@0.711,-2.146 ; C15.2 1.994,-2.43 2.159,-2.265 2.159,-2.235 2.108,-2.184 v1(2.108,-2.159)
  L3_SIG w0.12: v1(0.914,-1.854) 1.219,-2.159 v1(2.108,-2.159)
IF1i_P: C9.1 C11.2 U1.E6 | length 2.1
  L1_Top w0.12: C9.1@0.762,-2.616 1.159,-2.616 1.219,-2.556 1.353,-2.556 C11.2@1.479,-2.43 ; U1.E6 1.317,-1.692 1.317,-2.268 C11.2@1.479,-2.43 ; C11.2 C11.2@1.479,-2.43
IF1q_N: C12.1 C14.2 U1.K6 | length 2.6
  L1_Top w0.12: v1(-1.549,-2.159) -1.549,-2.166 -1.527,-2.188 -1.86,-2.188 C12.1 -1.863,-1.991 -1.5,-1.628 U1.K6@-1.5,-1.426 ; C14.2 v1(-0.662,-2.057)
  L4_Bot w0.12: v1(-1.549,-2.159) -0.799,-2.159 -0.781,-2.177 v1(-0.662,-2.057)
IF1q_P: C8.1 C10.2 U1.J6 | length 1.9
  L1_Top w0.12: C8.1 -1.863,-2.601 -1.258,-2.601 C10.2 -1.043,-2.386 -1.043,-2.22 -1.047,-2.217 -1.047,-1.473 U1.J6@-1,-1.426
IFI: C5.1 P2.5 R7.1 U1.L1 | length 5.3
  L1_Top w0.12: v1(-5.309,1.245) -5.219,1.245 -5.066,1.091 R7.1 C5.1 ; U1.L1 -1.956,1.331 -1.956,1.044 -1.863,0.951 v1(-1.863,0.875)
  L4_Bot w0.12: v1(-5.309,1.245) -5.298,1.245 -5.075,1.022 -4.667,1.022 P2.5 -4.623,1.022 -3.942,1.022 -3.83,1.134 -2.668,1.134 -2.409,0.875 v1(-1.863,0.875)
IFI_PostLPF: C9.2 U1.H6 | length 1.5
  L1_Top w0.12: U1.H6 -0.101,-1.774 -0.101,-2.313 C9.2@0.172,-2.586
IFIx_PostLPF: C13.2 U1.G6 | length 0.9
  L1_Top w0.12: U1.G6 0.034,-1.409 0.034,-1.462 0.284,-1.712 0.284,-2.169 C13.2
IFQ: C6.2 P2.7 R8.2 U1.K1 | length 6.3
  L1_Top w0.12: v1(-5.274,0.542) -5.19,0.542 -5.182,0.533 -5.169,0.546 -4.784,0.546 R8.2 -4.727,0.514 -4.727,0.272 -4.576,0.121 C6.2 ; U1.K1 -1.5,1.313 -1.32,1.133 -1.32,0.929 v1(-1.266,0.875)
  L4_Bot w0.12: v1(-5.274,0.542) -5.19,0.542 -5.182,0.533 -5.148,0.567 -4.678,0.567 P2.7 -4.012,0.6 -3.785,0.827 -2.96,0.827 -2.575,0.442 -1.424,0.442 -1.266,0.6 v1(-1.266,0.875)
IFQ_PostLPF: C8.2 U1.M5 | length 3
  L1_Top w0.12: v1(-2.667,-2.601) -2.639,-2.629 -2.326,-2.629 C8.2 ; U1.M5@-2.497,-0.878 -2.067,-0.878 v1(-2,-0.812)
  L4_Bot w0.12: v1(-2.667,-2.601) -2,-1.934 v1(-2,-0.812)
IFQx_PostLPF: C12.2 U1.L6 | length 0.9
  L1_Top w0.12: C12.2 -2.268,-2.146 -2.268,-1.999 -2,-1.731 U1.L6
IRQ: P1.6 R5.2 | length 5.6
  L1_Top w0.12: R5.2 0.724,2.579 1.146,2.579 v1(1.159,2.565)
  L4_Bot w0.12: v1(1.159,2.565) 1.248,2.565 1.42,2.737 4.083,2.737 4.153,2.667 4.153,1.223 4.376,1 P1.6
NetD3_2: D3.2 R17.1 | length 0.5
  L1_Top w0.12: R17.1 -8.78,0.184 -8.78,0.018 -8.759,-0.003 D3.2
NetP_2: P.2 R2.1 | length 0.4
  L1_Top w0.12: P.2 R2.1
NetR1_1: R1.1 T.2 | length 0.4
  L1_Top w0.12: R1.1 T.2
NetR24_1: R24.1 U2.3 | length 0.4
  L1_Top w0.2: U2.3@7.701,-1.734 7.711,-1.734 7.873,-1.895 7.873,-2.078 R24.1
OpenDrain_LED: D3.1 P2.1 | length 4.9
  L1_Top w0.12: D3.1 -8.302,-0.221 -7.269,-0.221 -7.048,0 v1(-6.452,0)
  L4_Bot w0.12: v1(-6.452,0) -6.452,0.646 -5.298,1.8 P2.1
Phase_Det_Out: P4.2 P.1 Q1.3 R16.1 | length 6.2
  L1_Top w0.12: P4.2@-9.897,-1.27 -9.897,-1.701 -9.085,-2.512 -8.433,-2.512 -8.309,-2.389 P.1 -8.062,-2.197 -7.792,-1.927 R16.1 -7.484,-1.927 -7.289,-1.732 -6.207,-1.732 -5.497,-2.442 Q1.3@-5.497,-2.725
QS1: J1.2 R3.1 U1.M6 | length 1.5
  L1_Top w0.12: R3.1 J1.2 -3.128,-2.114 -2.534,-1.521 -2.534,-1.409 U1.M6
QS2: R9.2 R10.2 U1.N5 | length 11.7
  L1_Top w0.12: v1(-3.626,-1.119) -3.382,-0.875 U1.N5 ; R10.2 R9.2 5.791,-0.914 v1(5.791,-0.559)
  L3_SIG w0.12: v1(-3.626,-1.119) -3.548,-1.197 2.339,-1.197 2.93,-0.606 4.325,-0.606 4.333,-0.614 5.736,-0.614 v1(5.791,-0.559)
QS3: R19.2 R20.2 U1.B1 | length 5.2
  L1_Top w0.12: U1.B1 2.5,1.424 2.845,1.769 v1(2.845,1.854) ; R20.2@5.105,0.999 R19.2 5.819,0.844 5.766,0.792 v1(5.766,0.533)
  L3_SIG w0.12: v1(2.845,1.854) 2.845,1.778 3.524,1.098 4.718,1.098 5.283,0.533 v1(5.766,0.533)
QS4: J2.2 R4.1 U1.M1 | length 0.9
  L1_Top w0.12: J2.2 R4.1 ; R4.1@-2.506,1.95 -2.506,1.381 U1.M1
Target_Det_Out: P4.1 Q1.6 R14.1 T.1 | length 4.8
  L1_Top w0.12: P4.1@-9.897,1.27 -9.47,0.843 -9.47,-0.222 -9.139,-0.554 -8.574,-0.554 T.1@-8.309,-0.819 ; T.1 T.1@-8.309,-0.819 ; Q1.6@-6.797,-0.475 -7.736,-0.475 R14.1 -7.792,-0.531 -8.022,-0.531 T.1@-8.309,-0.819
VDD_PLL: C2.2 C7.2 J3.1 J4.1 P2.11 Q1.2 Q1.5 R3.2 R4.2 R7.2 R8.1 R9.1 R13.2 R15.2 R18.1 R19.1 R22.1 R23.1 R25.1 R28.1 U1.A2 U1.B2 U1.M2 U1.N2 | length 43.5
  L1_Top w0.12: R13.2 -7.794,-2.698 -7.048,-1.952 -6.532,-1.952 v1(-6.147,-2.337) Q1.2@-6.147,-2.725 ; v1(-6.147,-0.864) Q1.5@-6.147,-0.475 ; R7.2@-4.322,1.072 R8.1 -4.277,0.514 -4.277,0.143 -4.232,0.098 R15.2 -4.189,0.1 -3.968,0.1 v1@-3.631,0.437 ; -4.004,0.991 -3.855,0.842 C7.2 -3.793,0.858 -3.017,0.858 U1.N2 U1.M2 ; v1(-3.988,-2.489) -3.937,-2.54 -3.623,-2.54 -3.578,-2.585 R3.2 ; R4.2@-2.061,1.956 -2.058,1.953 -1.705,1.953 v1(-1.702,1.949) ; U1.B2 U1.A2 3.025,0.9 3.828,0.9 C2.2 3.816,0.867 3.771,0.822 3.771,0.709 3.632,0.571 v1(3.632,0.483) ; J4.1 3.333,2.372 3.648,2.372 v1(3.683,2.337) 4.083,2.737 5.164,2.737 5.519,2.381 5.519,2.143 R19.1 ; J3.1 3.886,-2.744 3.89,-2.74 4.314,-2.74 R28.1 4.396,-2.815 5.415,-2.815 v1(5.664,-2.565) R9.1@5.664,-2.042
  L1_Top w0.15: -4.189,1.067 -4.113,0.991 -4.004,0.991
  L1_Top w0.2: R7.2@-4.322,1.072 R7.2 ; R7.2@-4.317,1.067 -4.189,1.067 ; v1(3.632,0.483) 3.886,0.229 5.452,0.229 5.686,-0.005 6.426,-0.005 6.429,-0.003 R23.1@6.938,-0.003 ; R19.1 R18.1 6.502,2.074 6.844,2.074 6.989,1.929 R22.1 ; R23.1@6.989,0.1 R22.1@6.989,0.437
  L3_SIG w0.12: v1(-6.147,-2.337) -4.14,-2.337 v1(-3.988,-2.489) ; v1(-3.626,0.432) -3.626,0.442 -3.626,1.098 -2.775,1.949 v1(-1.702,1.949)
  L3_SIG w0.2: v1(-3.626,0.432) -3.616,0.442 0.168,0.442 0.405,0.679 2.193,0.679 2.389,0.483 v1(3.632,0.483)
  L3_SIG w0.25: v1(-6.147,-0.864) -4.931,-0.864 v1@-3.626,0.442
  L4_Bot w0.12: v1(-6.147,-0.864) -5.82,-0.864 -5.196,-0.24 -4.685,-0.24 P2.11 ; v1(5.664,-2.565) 5.664,-1.524 6.223,-0.965 v1(6.223,-0.203)
  L4_Bot w0.25: v1(-6.147,-2.337) v1(-6.147,-0.864)
Vin: C3.2 C4.2 L1.2 L3.2 L5.2 R1.2 R2.2 R14.2 R16.2 R24.2 U2.4 | length 22.1
  L1_Top w0.12: R2.2 R1.2 -8.294,-1.324 -8.18,-1.324 -8.072,-1.432 -7.792,-1.432 R16.2 ; R14.2 R16.2 ; v1(-5.436,-1.803) -5.626,-1.803 -5.953,-1.477 R16.2 ; C4.2 C3.2 7.518,-2.891 7.693,-2.891 7.841,-2.744 v1@7.856,-2.744
  L1_Top w0.2: v1@7.856,-2.744 8.153,-2.447 ; L3.2 8.329,-2.44 8.329,-2.085 R24.2 8.333,-2.078 8.333,-1.752 U2.4@8.351,-1.734 ; U2.4@8.426,-1.624 8.458,-1.624 8.701,-1.381 8.701,-1.112 8.98,-0.832 L1.2 L5.2
  L4_Bot w0.1: v1(-5.436,-1.803) -5.436,-2.216 -4.654,-2.997 -1.041,-2.997 -0.411,-2.367 0.191,-2.367 0.811,-2.986 7.58,-2.986 v1@7.802,-2.764
  other v1: 7.856,-2.818
Xosc_ai: C16.1 U1.J1 Y1.1 | length 9.6
  L1_Top w0.12: Y1.1 -8.18,1.067 -7.52,0.407 -5.914,0.407 -5.766,0.555 -5.766,1.384 -4.766,2.384 -1.592,2.384 -1.157,1.949 -1.015,1.949 C16.1 U1.J1
Xosc_ao: C17.2 U1.H1 Y1.3 | length 8.9
  L1_Top w0.12: Y1.3 -6.21,2.737 -0.019,2.737 0.284,2.434 0.284,2.116 0.058,1.89 -0.456,1.89 C17.2 U1.H1
pads on no net: P1.20 P2.2 P2.3 P2.4 P2.6 P2.8 P2.10 P2.12 P2.13 P2.14 P2.15 P2.17 P2.18

## Polygon pours and split planes (outlines as drawn)
GND on L4_Bot "L4_GND" (solid, pour order 8): -10.16,1.222 -10.16,-1.472 ccw(c-8.382,-1.472) -8.382,-3.25 8.382,-3.25 ccw(c8.382,-1.472) 10.16,-1.472 10.16,1.222 ccw(c8.382,1.222) 8.382,3 -8.382,3 ccw(c-8.382,1.222)
GND on L3_SIG "L3_SIG-GND" (solid, pour order 10): -10.16,1.222 -10.16,-1.472 ccw(c-8.382,-1.472) -8.382,-3.25 8.382,-3.25 ccw(c8.382,-1.472) 10.16,-1.472 10.16,1.222 ccw(c8.382,1.222) 8.382,3 -8.382,3 ccw(c-8.382,1.222)
no net on L2_GND (split plane): 8.525,2.491 8.666,2.467 8.804,2.428 8.936,2.373 9.062,2.304 9.178,2.221 9.285,2.125 9.381,2.018 9.464,1.902 9.533,1.776 9.588,1.644 9.627,1.506 9.651,1.365 9.659,1.234 9.658,1.222 9.658,-1.472 9.659,-1.484 9.651,-1.615 9.627,-1.756 9.588,-1.894 9.533,-2.026 9.464,-2.152 9.381,-2.268 9.285,-2.375 9.178,-2.471 9.062,-2.554 8.936,-2.623 8.804,-2.678 8.666,-2.717 8.525,-2.741 8.394,-2.749 8.382,-2.748 -8.382,-2.748 -8.394,-2.749 -8.525,-2.741 -8.666,-2.717 -8.804,-2.678 -8.936,-2.623 -9.062,-2.554 -9.178,-2.471 -9.285,-2.375 -9.381,-2.268 -9.464,-2.152 -9.533,-2.026 -9.588,-1.894 -9.627,-1.756 -9.651,-1.615 -9.659,-1.484 -9.658,-1.472 -9.658,1.222 -9.659,1.234 -9.651,1.365 -9.627,1.506 -9.588,1.644 -9.533,1.776 -9.464,1.902 -9.381,2.018 -9.285,2.125 -9.178,2.221 -9.062,2.304 -8.936,2.373 -8.804,2.428 -8.666,2.467 -8.525,2.491 -8.394,2.499 -8.382,2.498 8.382,2.498 8.394,2.499

## Other copper
L1_Top:
  rectangle net GND: 6.886,-2.386 7.626,-2.146
  rectangle net GND: 7.087,-1.254 8.026,-0.294

## Silkscreen, mask and mechanical layers (free items; w line width, h text height)
Top Overlay:
  circle w0.8: c-5.334,2.108 r0.2
  text "HT" at 3.52,2.05 h0.7
  text "E" at 6.826,-0.009 h0.7 r90
  text "G" at 5.264,-0.025 h0.7 r90
  text "V" at 6.026,-0.042 h0.7 r90
  text "TS" at 3.5,-0.7 h0.7
Bottom Overlay:
  drawing of 12 lines, arcs and shapes, not listed
  text "TD" at -8.179,2.042 h1 r90
  text "VIN" at 8.204,0.363 h1 r270
  text "PD" at -8.179,-0.533 h1 r90
  text "60LTR11AiPV2.0" at 4.166,-1.829 h0.79
  text "GND" at 8.204,-2.6 h1 r270
  text "CW21-2021" at 3.302,-2.921 h0.79
M3 (ASY_Text_Top):
  the board outline again, w0.4

## Dimensions
8.382,3 to 8.382,-3.25 on M11 (Dimension_Top)
-8.382,3 to -8.382,-3.25 on M11 (Dimension_Top)